# EAGLE board DukeBoard_breakout_board_v1 (EAGLE 8.2.2)
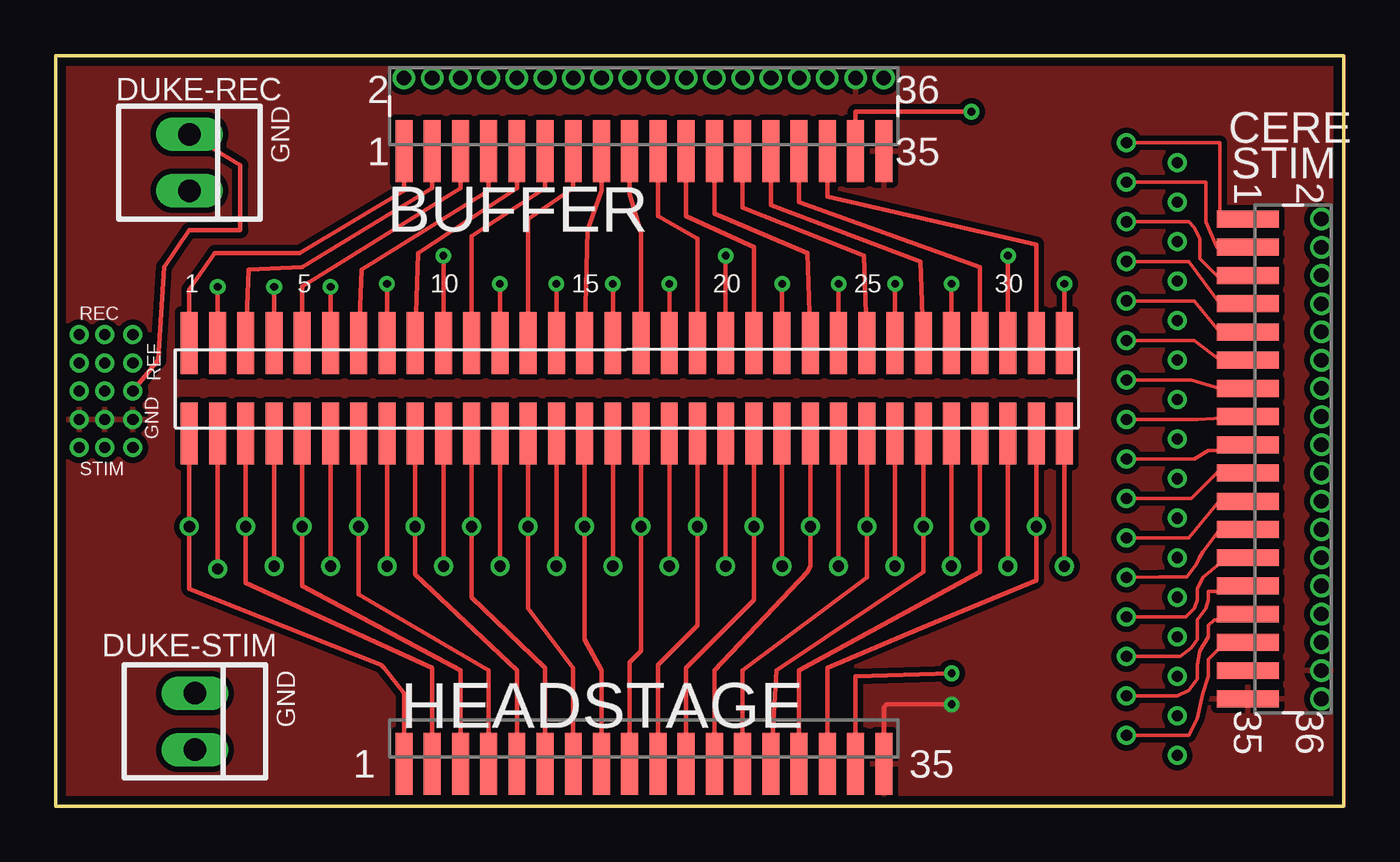
[diagram p0: board, top side]
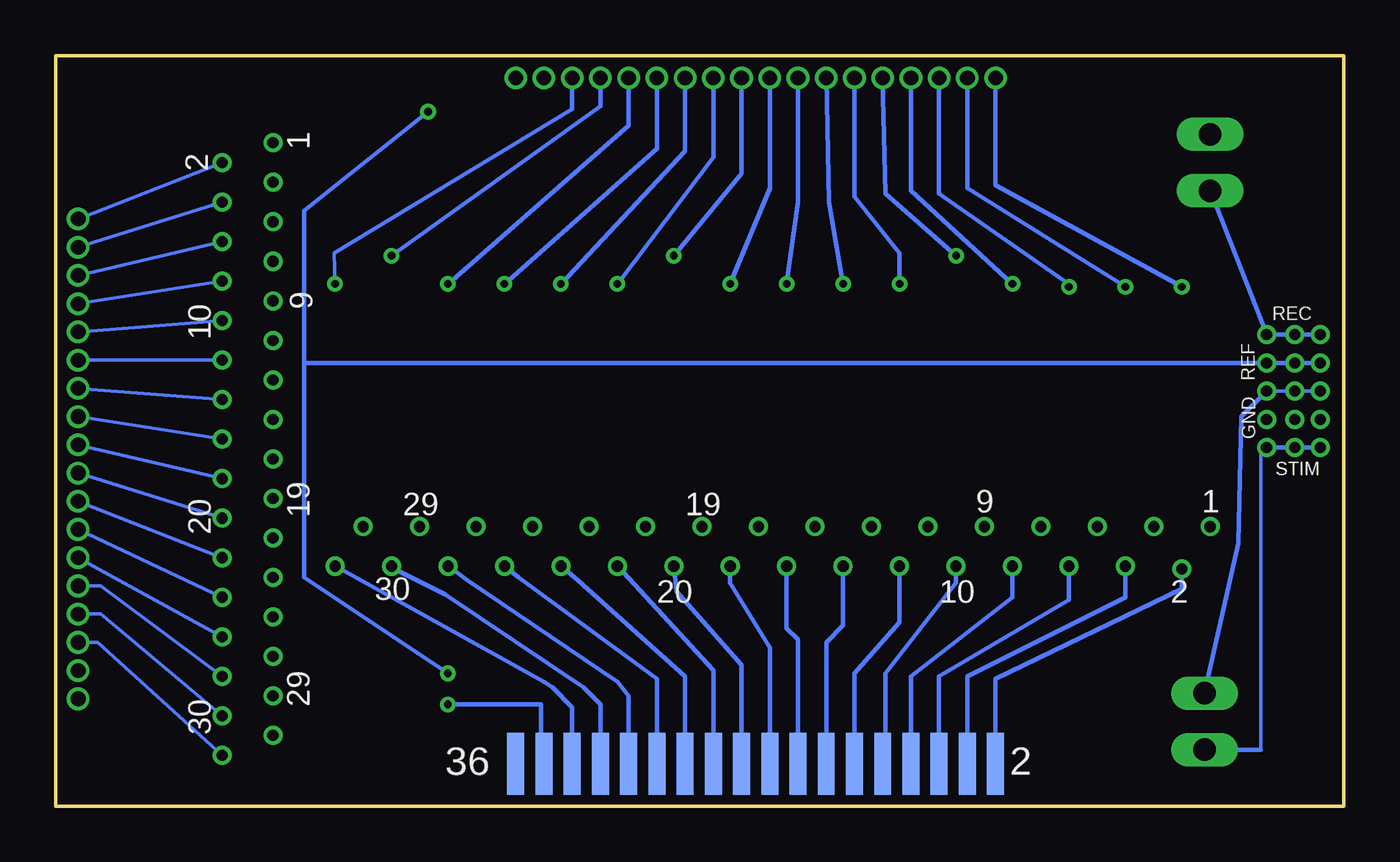
[diagram p1: board, bottom side, seen from below]

Size 57.96 x 33.77 mm. Coordinates in mm from the lower left corner, seen from the top.
Outline: 57.96,0 0,0 0,33.77 57.96,33.77 57.96,0
Copper layers (1*16): Top 0.0356mm / dielectric 1.5011mm / Bottom 0.0356mm
Design rules "oshpark-2layer": minimum track width 6mil, minimum drill 13mil, track to track 6mil, track to pad 6mil, pad to pad 6mil, via to via 6mil, smd to smd 6mil, copper to edge 15mil, drill to drill 6mil, minimum pad ring 7mil, minimum via ring 7mil, stop-mask expansion 2.5mil, vias tented up to drill 0mil, thermal gap 10mil

## Footprints (pad centres in the part's own frame; a part is rotated, then mirrored left to right if it is on the bottom)
FTSH-118-01-L-MT = smd 0.762 x 2.794: 1 -9.525,-2.032; 3 -8.255,-2.032; 5 -6.985,-2.032; 7 -5.715,-2.032; 9 -4.445,-2.032; 11 -3.175,-2.032; 13 -1.905,-2.032; 15 -0.635,-2.032; 17 0.635,-2.032; 19 1.905,-2.032; 21 3.175,-2.032; 23 4.445,-2.032; 25 5.715,-2.032; 27 6.985,-2.032; 29 8.255,-2.032; 31 9.525,-2.032; 33 10.795,-2.032; 35 12.065,-2.032 | drill 0.66: 2 -9.525,1.27; 4 -8.255,1.27; 6 -6.985,1.27; 8 -5.715,1.27; 10 -4.445,1.27; 12 -3.175,1.27; 14 -1.905,1.27; 16 -0.635,1.27; 18 0.635,1.27; 20 1.905,1.27; 22 3.175,1.27; 24 4.445,1.27; 26 5.715,1.27; 28 6.985,1.27; 30 8.255,1.27; 32 9.525,1.27; 34 10.795,1.27; 36 12.065,1.27
22-23-2021 = drill 1 long: 1 -1.27,0; 2 1.27,0
SFMC-118-L1-S-D = smd 0.762 x 2.794: 1 -10.795,-2.032; 3 -9.525,-2.032; 5 -8.255,-2.032; 7 -6.985,-2.032; 9 -5.715,-2.032; 11 -4.445,-2.032; 13 -3.175,-2.032; 15 -1.905,-2.032; 17 -0.635,-2.032; 19 0.635,-2.032; 21 1.905,-2.032; 23 3.175,-2.032; 25 4.445,-2.032; 27 5.715,-2.032; 29 6.985,-2.032; 31 8.255,-2.032; 33 9.525,-2.032; 35 10.795,-2.032 | smd 0.762 x 2.794 bottom: 2 -10.795,-2.032; 4 -9.525,-2.032; 6 -8.255,-2.032; 8 -6.985,-2.032; 10 -5.715,-2.032; 12 -4.445,-2.032; 14 -3.175,-2.032; 16 -1.905,-2.032; 18 -0.635,-2.032; 20 0.635,-2.032; 22 1.905,-2.032; 24 3.175,-2.032; 26 4.445,-2.032; 28 5.715,-2.032; 30 6.985,-2.032; 32 8.255,-2.032; 34 9.525,-2.032; 36 10.795,-2.032
VIA = drill 0.5 pad 0.813: P$1 0,0
FTSH-132-01-DV = smd 0.762 x 2.794: 1 -10.795,-2.032; 2 -10.795,2.032; 3 -9.525,-2.032; 4 -9.525,2.032; 5 -8.255,-2.032; 6 -8.255,2.032; 7 -6.985,-2.032; 8 -6.985,2.032; 9 -5.715,-2.032; 10 -5.715,2.032; 11 -4.445,-2.032; 12 -4.445,2.032; 13 -3.175,-2.032; 14 -3.175,2.032; 15 -1.905,-2.032; 16 -1.905,2.032; 17 -0.635,-2.032; 18 -0.635,2.032; 19 0.635,-2.032; 20 0.635,2.032; 21 1.905,-2.032; 22 1.905,2.032; 23 3.175,-2.032; 24 3.175,2.032; 25 4.445,-2.032; 26 4.445,2.032; 27 5.715,-2.032; 28 5.715,2.032; 29 6.985,-2.032; 30 6.985,2.032; 31 8.255,-2.032; 32 8.255,2.032; 33 9.525,-2.032; 34 9.525,2.032; 35 10.795,-2.032; 36 10.795,2.032; 37 12.065,-2.032; 38 12.065,2.032; 39 13.335,-2.032; 40 13.335,2.032; 41 14.605,-2.032; 42 14.605,2.032; 43 15.875,-2.032; 44 15.875,2.032; 45 17.145,-2.032; 46 17.145,2.032; 47 18.415,-2.032; 48 18.415,2.032; 49 19.685,-2.032; 50 19.685,2.032; 51 20.955,-2.032; 52 20.955,2.032; 53 22.225,-2.032; 54 22.225,2.032; 55 23.495,-2.032; 56 23.495,2.032; 57 24.765,-2.032; 58 24.765,2.032; 59 26.035,-2.032; 60 26.035,2.032; 61 27.305,-2.032; 62 27.305,2.032; 63 28.575,-2.032; 64 28.575,2.032
LPPB051NFFN-RC = drill 0.5: P$1 0,0; P$2 -1.27,0; P$3 -2.54,0; P$4 -3.81,0; P$5 -5.08,0

## Placement (x,y rotation side)
BUFFER  FTSH-118-01-L-MTREGULAR  [FTSH-118-01-L-MT]  25.2,31.5 0 top
DUKE-REC  22-23-2021  [22-23-2021]  6.02,28.96 270 top
DUKE-STIM  22-23-2021  [22-23-2021]  6.27,3.81 270 top
HEADSTAGE  SFMC-118-L1-S-D  [SFMC-118-L1-S-D]  26.47,3.94 0 top
STIM  FTSH-118-01-L-MTREGULAR  [FTSH-118-01-L-MT]  55.68,16.89 270 top
U$1  VIA  [VIA]  50.47,28.96 0 bottom
U$2  VIA  [VIA]  50.47,27.18 90 top
U$3  FTSH-132-01-L-DV  [FTSH-132-01-DV]  16.82,18.8 0 top
U$4  VIA  [VIA]  50.47,25.4 0 bottom
U$5  VIA  [VIA]  50.47,23.62 0 bottom
U$6  VIA  [VIA]  50.47,21.84 0 bottom
U$7  VIA  [VIA]  50.47,20.07 0 bottom
U$8  VIA  [VIA]  50.47,18.29 0 bottom
U$9  VIA  [VIA]  50.47,16.51 0 bottom
U$10  VIA  [VIA]  50.47,14.73 0 bottom
U$11  VIA  [VIA]  50.47,12.95 0 bottom
U$12  VIA  [VIA]  50.47,11.18 0 bottom
U$13  VIA  [VIA]  50.47,9.4 0 bottom
U$14  VIA  [VIA]  50.47,7.62 0 bottom
U$15  VIA  [VIA]  50.47,5.84 0 bottom
U$16  VIA  [VIA]  50.47,4.06 0 bottom
U$17  VIA  [VIA]  50.47,2.29 0 bottom
U$18  VIA  [VIA]  48.18,3.17 0 bottom
U$19  VIA  [VIA]  48.18,4.95 0 bottom
U$20  VIA  [VIA]  48.18,6.73 0 bottom
U$21  VIA  [VIA]  48.18,8.51 0 bottom
U$22  VIA  [VIA]  48.18,10.29 0 bottom
U$23  VIA  [VIA]  48.18,12.06 0 bottom
U$24  VIA  [VIA]  48.18,13.84 0 bottom
U$25  VIA  [VIA]  48.18,15.62 0 bottom
U$26  VIA  [VIA]  48.18,17.4 0 bottom
U$27  VIA  [VIA]  48.18,19.18 0 bottom
U$28  VIA  [VIA]  48.18,20.95 0 bottom
U$29  VIA  [VIA]  48.18,22.73 0 bottom
U$30  VIA  [VIA]  48.18,24.51 0 bottom
U$31  VIA  [VIA]  48.18,26.29 0 bottom
U$32  VIA  [VIA]  48.18,28.07 0 bottom
U$33  VIA  [VIA]  48.18,29.84 0 bottom
U$34  LPPB051NFFN-RC  [LPPB051NFFN-RC]  3.48,21.21 90 bottom
U$35  LPPB051NFFN-RC  [LPPB051NFFN-RC]  1.07,21.21 90 bottom
U$36  LPPB051NFFN-RC  [LPPB051NFFN-RC]  2.21,21.21 90 bottom

## Library data of the parts
BUFFER HEADSTAGE STIM U$3 = tuckerLib2
DUKE-REC DUKE-STIM = con-molex; MF: MOLEX; MPN: 22-23-2021; OC_FARNELL: 1462926; OC_NEWARK: 25C3832
U$1 U$2 U$4-U$36 = Sombeck_lib

## Nets
0V: BUFFER.33 HEADSTAGE.33 U$34.P$2 U$35.P$2 U$36.P$2
GND: BUFFER.34 BUFFER.35 HEADSTAGE.34 HEADSTAGE.35 STIM.34 STIM.35 U$34.P$4 U$35.P$4 U$36.P$4
N$1: BUFFER.1 U$3.2
N$2: BUFFER.29 U$3.58
N$3: BUFFER.3 U$3.6
N$4: BUFFER.2 U$3.4
N$5: BUFFER.5 U$3.10
N$6: BUFFER.7 U$3.14
N$7: BUFFER.9 U$3.18
N$8: BUFFER.11 U$3.22
N$9: BUFFER.13 U$3.26
N$10: BUFFER.15 U$3.30
N$11: BUFFER.17 U$3.34
N$12: BUFFER.19 U$3.38
N$13: BUFFER.27 U$3.54
N$14: BUFFER.23 U$3.46
N$15: BUFFER.25 U$3.50
N$16: BUFFER.4 U$3.8
N$17: BUFFER.6 U$3.12
N$18: BUFFER.31 U$3.62
N$19: BUFFER.8 U$3.16
N$20: BUFFER.10 U$3.20
N$21: BUFFER.12 U$3.24
N$22: BUFFER.14 U$3.28
N$23: BUFFER.16 U$3.32
N$24: BUFFER.18 U$3.36
N$25: BUFFER.20 U$3.40
N$26: BUFFER.21 U$3.42
N$27: BUFFER.22 U$3.44
N$28: BUFFER.24 U$3.48
N$29: BUFFER.26 U$3.52
N$30: BUFFER.28 U$3.56
N$31: BUFFER.30 U$3.60
N$32: BUFFER.32 U$3.64
N$33: HEADSTAGE.1 U$3.1
N$34: HEADSTAGE.3 U$3.5
N$35: HEADSTAGE.5 U$3.9
N$36: HEADSTAGE.7 U$3.13
N$37: HEADSTAGE.9 U$3.17
N$38: HEADSTAGE.11 U$3.21
N$39: HEADSTAGE.13 U$3.25
N$40: HEADSTAGE.15 U$3.29
N$41: HEADSTAGE.17 U$3.33
N$42: HEADSTAGE.19 U$3.37
N$43: HEADSTAGE.21 U$3.41
N$44: HEADSTAGE.23 U$3.45
N$45: HEADSTAGE.25 U$3.49
N$46: HEADSTAGE.27 U$3.53
N$47: HEADSTAGE.29 U$3.57
N$48: HEADSTAGE.31 U$3.61
N$49: HEADSTAGE.2 U$3.3
N$50: HEADSTAGE.4 U$3.7
N$51: HEADSTAGE.6 U$3.11
N$52: HEADSTAGE.8 U$3.15
N$53: HEADSTAGE.10 U$3.19
N$54: HEADSTAGE.12 U$3.23
N$55: HEADSTAGE.14 U$3.27
N$56: HEADSTAGE.16 U$3.31
N$57: HEADSTAGE.18 U$3.35
N$58: HEADSTAGE.20 U$3.39
N$59: HEADSTAGE.22 U$3.43
N$60: HEADSTAGE.24 U$3.47
N$61: HEADSTAGE.26 U$3.51
N$62: HEADSTAGE.28 U$3.55
N$63: HEADSTAGE.30 U$3.59
N$64: HEADSTAGE.32 U$3.63
N$65: STIM.1 U$33.P$1
N$66: STIM.3 U$32.P$1
N$67: STIM.5 U$31.P$1
N$68: STIM.7 U$30.P$1
N$69: STIM.9 U$29.P$1
N$70: STIM.11 U$28.P$1
N$71: STIM.13 U$27.P$1
N$72: STIM.15 U$26.P$1
N$73: STIM.17 U$25.P$1
N$74: STIM.19 U$24.P$1
N$75: STIM.21 U$23.P$1
N$76: STIM.23 U$22.P$1
N$77: STIM.25 U$21.P$1
N$78: STIM.27 U$20.P$1
N$79: STIM.29 U$19.P$1
N$80: STIM.31 U$18.P$1
N$81: STIM.32 U$17.P$1
N$82: STIM.30 U$16.P$1
N$83: STIM.28 U$15.P$1
N$84: STIM.26 U$14.P$1
N$85: STIM.24 U$13.P$1
N$86: STIM.22 U$12.P$1
N$87: STIM.20 U$11.P$1
N$88: STIM.18 U$10.P$1
N$89: STIM.16 U$9.P$1
N$90: STIM.14 U$8.P$1
N$91: STIM.12 U$7.P$1
N$92: STIM.10 U$6.P$1
N$93: STIM.8 U$5.P$1
N$94: STIM.6 U$4.P$1
N$95: STIM.4 U$2.P$1
N$96: STIM.2 U$1.P$1
N$97: DUKE-REC.1 DUKE-STIM.1 U$34.P$3 U$35.P$3 U$36.P$3
N$98: DUKE-REC.2 U$34.P$1 U$35.P$1 U$36.P$1
N$99: DUKE-STIM.2 U$34.P$5 U$35.P$5 U$36.P$5

## Tracks (layer width: path | path; a pad name or v marks a point on that pad's centre or on a via)
0V  (via drill 0.35)
  Top 0.203: HEADSTAGE.33 35.99,5.84 v40.31,5.97 | BUFFER.33 35.99,31.24 v41.2,31.24
  Bottom 0.203: v40.31,5.97 46.79,10.29 46.79,19.94 | 46.79,19.94 U$34.P$2 U$36.P$2 U$35.P$2 | v41.2,31.24 46.79,26.8 46.79,19.94
GND  (via drill 0.35)
  Top 0.203: HEADSTAGE.35 37.26,4.45 37.39,4.57 v40.31,4.57
  Bottom 0.203: v40.31,4.57 36.12,4.57 36.12,2.92 HEADSTAGE.34
  pour Top (isolate 0.254): 57.84,0.13 57.71,33.78 0.43,33.78 0.43,0.13
N$1
  Top 0.203: U$3.2 6.02,23.24 7.16,24.89 10.97,24.89 15.67,27.69 BUFFER.1
N$2
  Top 0.203: BUFFER.29 33.45,27.18 41.58,24.26 U$3.58
N$3
  Top 0.203: BUFFER.3 16.94,27.81 11.1,24.26 8.69,24.13 U$3.6
N$4  (via drill 0.35 pad 0.55)
  Top 0.203: v7.29,23.37 U$3.4
  Bottom 0.203: BUFFER.2 15.67,27.94 v7.29,23.37
N$5
  Top 0.203: U$3.10 11.1,23.37 18.21,27.81 BUFFER.5
N$6
  Top 0.203: U$3.14 13.77,24.13 19.48,27.69 BUFFER.7
N$7
  Top 0.203: U$3.18 16.31,24.89 20.75,27.81 BUFFER.9
N$8
  Top 0.203: U$3.22 18.72,25.65 22.02,27.81 BUFFER.11
N$9
  Top 0.203: U$3.26 21.26,26.42 23.29,27.81 BUFFER.13
N$10
  Top 0.203: U$3.30 23.93,25.91 24.56,27.69 BUFFER.15
N$11
  Top 0.203: U$3.34 26.34,25.78 25.83,27.56 BUFFER.17
N$12
  Top 0.203: U$3.38 28.88,25.53 27.1,26.54 BUFFER.19
N$13
  Top 0.203: U$3.54 38.91,24.51 32.18,27.05 BUFFER.27
N$14
  Top 0.203: U$3.46 33.83,24.89 29.64,26.67 BUFFER.23
N$15
  Top 0.203: U$3.50 36.37,24.77 30.91,26.92 BUFFER.25
N$16  (via drill 0.35 pad 0.55)
  Top 0.203: v9.83,23.37 U$3.8
  Bottom 0.203: BUFFER.4 16.94,27.81 v9.83,23.37
N$17  (via drill 0.35 pad 0.55)
  Top 0.203: v12.37,23.37 U$3.12
  Bottom 0.203: BUFFER.6 18.21,27.56 12.37,23.5 v12.37,23.37
N$18
  Top 0.203: U$3.62 44.12,25.27 34.72,27.43 BUFFER.31
N$19  (via drill 0.35 pad 0.55)
  Top 0.203: v14.91,23.5 U$3.16
  Bottom 0.203: BUFFER.8 19.48,27.69 v14.91,23.5
N$20  (via drill 0.35 pad 0.55)
  Top 0.203: v17.45,24.77 U$3.20
  Bottom 0.203: BUFFER.10 20.62,27.56 v17.45,24.77
N$21  (via drill 0.35 pad 0.55)
  Top 0.203: v19.99,23.5 U$3.24
  Bottom 0.203: BUFFER.12 22.02,27.43 19.99,24.89 v19.99,23.5
N$22  (via drill 0.35 pad 0.55)
  Top 0.203: v22.53,23.5 U$3.28
  Bottom 0.203: BUFFER.14 23.17,27.18 v22.53,23.5
N$23  (via drill 0.35 pad 0.55)
  Top 0.203: v25.07,23.5 U$3.32
  Bottom 0.203: BUFFER.16 24.56,27.18 v25.07,23.5
N$24  (via drill 0.35 pad 0.55)
  Top 0.203: v27.61,23.5 U$3.36
  Bottom 0.203: BUFFER.18 25.83,27.81 v27.61,23.5
N$25  (via drill 0.35 pad 0.55)
  Top 0.203: v30.15,24.77 U$3.40
  Bottom 0.203: BUFFER.20 27.1,28.45 v30.15,24.77
N$26
  Top 0.203: U$3.42 31.42,25.15 28.37,26.54 BUFFER.21
N$27  (via drill 0.35 pad 0.55)
  Top 0.203: v32.69,23.5 U$3.44
  Bottom 0.203: BUFFER.22 28.37,29.21 v32.69,23.5
N$28  (via drill 0.35 pad 0.55)
  Top 0.203: v35.23,23.5 U$3.48
  Bottom 0.203: BUFFER.24 29.64,29.46 v35.23,23.5
N$29  (via drill 0.35 pad 0.55)
  Top 0.203: v37.77,23.5 U$3.52
  Bottom 0.203: BUFFER.26 30.91,29.59 v37.77,23.5
N$30  (via drill 0.35 pad 0.55)
  Top 0.203: v40.31,23.5 U$3.56
  Bottom 0.203: BUFFER.28 32.18,30.61 v40.31,23.5
N$31  (via drill 0.35 pad 0.55)
  Top 0.203: U$3.60 v42.85,24.77
  Bottom 0.203: v42.85,24.77 33.45,31.5 BUFFER.30
N$32  (via drill 0.35 pad 0.55)
  Top 0.203: v45.39,23.5 U$3.64
  Bottom 0.152: 34.72,31.37 45.43,24.89 v45.39,23.5
  Bottom 0.203: BUFFER.32 34.72,31.37
N$33  (via drill 0.5)
  Top 0.203: U$3.1 v6.02,12.57 6.02,9.78 14.66,6.35 14.78,6.22 15.67,5.08 HEADSTAGE.1
N$34  (via drill 0.5)
  Top 0.203: U$3.5 v8.56,12.57 8.56,10.03 16.94,6.22 HEADSTAGE.3
N$35  (via drill 0.5)
  Top 0.203: U$3.9 v11.1,12.57 11.1,9.91 18.21,6.1 HEADSTAGE.5
N$36  (via drill 0.5)
  Top 0.203: U$3.13 v13.64,12.57 13.64,9.53 19.48,6.1 HEADSTAGE.7
N$37  (via drill 0.5)
  Top 0.203: U$3.17 v16.18,12.57 16.18,10.41 20.75,6.1 HEADSTAGE.9
N$38  (via drill 0.5)
  Top 0.203: U$3.21 v18.72,12.57 18.72,9.4 22.02,6.22 HEADSTAGE.11
N$39  (via drill 0.5)
  Top 0.203: U$3.25 v21.26,12.57 21.26,8.89 23.29,6.22 HEADSTAGE.13
N$40  (via drill 0.5)
  Top 0.203: U$3.29 v23.8,12.57 23.8,7.49 24.56,6.1 HEADSTAGE.15
N$41  (via drill 0.5)
  Top 0.203: U$3.33 v26.34,12.57 26.34,6.99 25.83,6.48 HEADSTAGE.17
N$42  (via drill 0.5)
  Top 0.203: U$3.37 v28.88,12.57 28.88,8.13 27.1,6.35 HEADSTAGE.19
N$43  (via drill 0.5)
  Top 0.203: U$3.41 v31.42,12.57 31.42,9.27 28.37,6.22 HEADSTAGE.21
N$44  (via drill 0.5)
  Top 0.203: U$3.45 v33.96,12.57 33.96,10.79 33.83,10.54 29.64,6.1 HEADSTAGE.23
N$45  (via drill 0.5)
  Top 0.203: U$3.49 v36.5,12.57 36.5,10.29 30.91,6.1 HEADSTAGE.25
N$46  (via drill 0.5)
  Top 0.203: U$3.53 v39.04,12.57 39.04,10.54 32.44,6.1 HEADSTAGE.27
N$47  (via drill 0.5)
  Top 0.203: U$3.57 v41.58,12.57 41.58,10.54 33.45,6.1 HEADSTAGE.29
N$48  (via drill 0.5)
  Top 0.203: U$3.61 v44.12,12.57 44.12,10.16 38.91,8 34.72,6.22 HEADSTAGE.31
N$49  (via drill 0.5 pad 0.55)
  Top 0.203: v7.29,10.67 U$3.3
  Bottom 0.203: v7.29,10.67 7.29,9.78 15.67,5.71 HEADSTAGE.2
N$50  (via drill 0.5 pad 0.55)
  Top 0.203: v9.83,10.79 U$3.7
  Bottom 0.203: v9.83,10.79 9.83,9.4 16.94,5.84 HEADSTAGE.4
N$51  (via drill 0.5 pad 0.55)
  Top 0.203: v12.37,10.79 U$3.11
  Bottom 0.203: v12.37,10.79 12.37,9.27 18.21,5.84 HEADSTAGE.6
N$52  (via drill 0.5 pad 0.55)
  Top 0.203: v14.91,10.79 U$3.15
  Bottom 0.203: v14.91,10.79 14.91,9.4 19.48,5.84 HEADSTAGE.8
N$53  (via drill 0.5 pad 0.55)
  Top 0.203: v17.45,10.79 U$3.19
  Bottom 0.203: v17.45,10.79 17.45,10.03 20.62,5.97 20.62,1.65 HEADSTAGE.10
N$54  (via drill 0.5 pad 0.55)
  Top 0.203: v19.99,10.79 U$3.23
  Bottom 0.203: v19.99,10.79 19.99,8.26 22.02,5.97 HEADSTAGE.12
N$55  (via drill 0.5 pad 0.55)
  Top 0.203: v22.53,10.79 U$3.27
  Bottom 0.203: v22.53,10.79 22.53,8.13 23.29,7.37 HEADSTAGE.14
N$56  (via drill 0.5 pad 0.55)
  Top 0.203: v25.07,10.79 U$3.31
  Bottom 0.203: v25.07,10.79 25.07,8 24.56,7.49 HEADSTAGE.16
N$57  (via drill 0.5 pad 0.55)
  Top 0.203: v27.61,10.79 U$3.35
  Bottom 0.203: v27.61,10.79 27.61,10.03 25.83,7.11 HEADSTAGE.18
N$58  (via drill 0.5 pad 0.55)
  Top 0.203: v30.15,10.79 U$3.39
  Bottom 0.203: v30.15,10.79 30.02,9.65 27.1,6.35 HEADSTAGE.20
N$59  (via drill 0.5 pad 0.55)
  Top 0.203: v32.69,10.79 U$3.43
  Bottom 0.203: v32.69,10.79 28.37,6.1 HEADSTAGE.22
N$60  (via drill 0.5 pad 0.55)
  Top 0.203: v35.23,10.79 U$3.47
  Bottom 0.203: v35.23,10.79 34.47,10.16 29.64,5.84 HEADSTAGE.24
N$61  (via drill 0.5 pad 0.55)
  Top 0.203: v37.77,10.79 U$3.51
  Bottom 0.203: v37.77,10.79 37.13,10.29 30.91,5.71 HEADSTAGE.26
N$62  (via drill 0.5 pad 0.55)
  Top 0.203: v40.31,10.79 U$3.55
  Bottom 0.203: v40.31,10.79 39.42,10.16 32.69,5.59 32.18,4.95 HEADSTAGE.28
N$63  (via drill 0.5 pad 0.55)
  Top 0.203: v42.85,10.79 U$3.59
  Bottom 0.203: v42.85,10.79 42.47,10.54 40.44,9.53 34.21,5.33 33.45,4.57 HEADSTAGE.30
N$64  (via drill 0.5 pad 0.55)
  Top 0.203: v45.39,10.79 U$3.63
  Bottom 0.203: v45.39,10.79 35.99,5.59 35.61,5.33 34.72,4.45 HEADSTAGE.32
N$65
  Top 0.152: STIM.1 52.38,26.42 52.38,29.84 U$33.P$1
N$66
  Top 0.152: STIM.3 52.25,25.15 51.74,26.29 51.74,28.07 U$32.P$1
N$67
  Top 0.152: STIM.5 52.25,23.88 51.49,24.64 51.49,25.53 51.23,26.04 50.98,26.29 U$31.P$1
N$68
  Top 0.152: STIM.7 52.38,22.61 50.98,24.51 U$30.P$1
N$69
  Top 0.152: STIM.9 52.38,21.34 51.23,22.73 U$29.P$1
N$70
  Top 0.152: STIM.11 52.38,20.07 51.23,20.95 U$28.P$1
N$71
  Top 0.152: STIM.13 52.38,18.8 51.11,19.18 U$27.P$1
N$72
  Top 0.152: U$26.P$1 51.36,17.4 STIM.15
N$73
  Top 0.152: STIM.17 52.38,16 51.87,16 51.23,15.62 U$25.P$1
N$74
  Top 0.152: STIM.19 52.25,14.99 51.11,13.84 U$24.P$1
N$75
  Top 0.152: STIM.21 52.25,13.59 50.98,12.06 U$23.P$1
N$76
  Top 0.152: STIM.23 52.38,12.45 51.61,11.43 51.46,11.17 51.33,10.87 50.9,10.32 50.17,10.32 49.66,10.31 U$22.P$1
N$77
  Top 0.152: STIM.25 52.76,10.92 52.38,10.92 51.61,10.29 51.36,9.78 51.36,9.27 51.23,8.89 50.85,8.51 U$21.P$1
N$78
  Top 0.152: STIM.27 52.38,9.65 51.87,9.65 51.87,9.27 51.74,8.89 51.36,8.38 51.36,7.49 51.11,7.11 50.6,6.73 U$20.P$1
N$79
  Top 0.152: STIM.29 52.38,8.38 52.12,8.38 51.87,8.13 51.87,7.62 51.49,6.99 51.36,6.35 51.36,5.71 50.98,5.21 50.47,4.95 U$19.P$1
N$80
  Top 0.152: STIM.31 52.38,7.11 51.87,6.6 51.87,5.84 51.61,5.08 51.36,3.94 50.98,3.17 U$18.P$1
N$81
  Bottom 0.152: STIM.32 56.06,7.37 U$17.P$1
N$82
  Bottom 0.152: STIM.30 55.93,8.64 U$16.P$1
N$83
  Bottom 0.152: STIM.28 55.93,9.91 U$15.P$1
N$84
  Bottom 0.152: STIM.26 U$14.P$1
N$85
  Bottom 0.152: STIM.24 U$13.P$1
N$86
  Bottom 0.152: STIM.22 U$12.P$1
N$87
  Bottom 0.152: STIM.20 U$11.P$1
N$88
  Bottom 0.152: STIM.18 U$10.P$1
N$89
  Bottom 0.152: STIM.16 U$9.P$1
N$90
  Bottom 0.152: STIM.14 U$8.P$1
N$91
  Bottom 0.152: STIM.12 U$7.P$1
N$92
  Bottom 0.152: STIM.10 U$6.P$1
N$93
  Bottom 0.152: STIM.8 U$5.P$1
N$94
  Bottom 0.152: STIM.6 U$4.P$1
N$95
  Bottom 0.152: STIM.4 U$2.P$1
N$96
  Bottom 0.152: STIM.2 U$1.P$1
N$97
  Top 0.203: U$34.P$3 4.62,20.07 4.88,24.26 6.02,25.91 8.31,25.91 8.31,28.83 DUKE-REC.1
  Bottom 0.152: U$34.P$3 U$36.P$3 U$35.P$3
  Bottom 0.203: DUKE-STIM.1 4.75,11.81 4.62,17.53 U$34.P$3
N$98
  Bottom 0.203: U$35.P$1 U$36.P$1 U$34.P$1 DUKE-REC.2
N$99
  Bottom 0.152: 3.73,2.54 3.73,15.81 3.42,16.13
  Bottom 0.203: DUKE-STIM.2 3.73,2.54 | U$34.P$5 3.42,16.13 U$36.P$5 U$35.P$5

## Text on the board
tPlace: GND | 1 | 5 | 10 | 15 | 20 | 25 | 30 | REC | REF | GND | STIM | GND
bPlace: 1 | 2 | 10 | REC | 9 | REF | GND | STIM | 19 | 20 | 1 | 9 | 19 | 29 | 2 | 10 | 20 | 30 | 29 | 30
tNames: CERE